# EAGLE board Commlink_Interface_V4_Landscape (EAGLE 6.5.0)
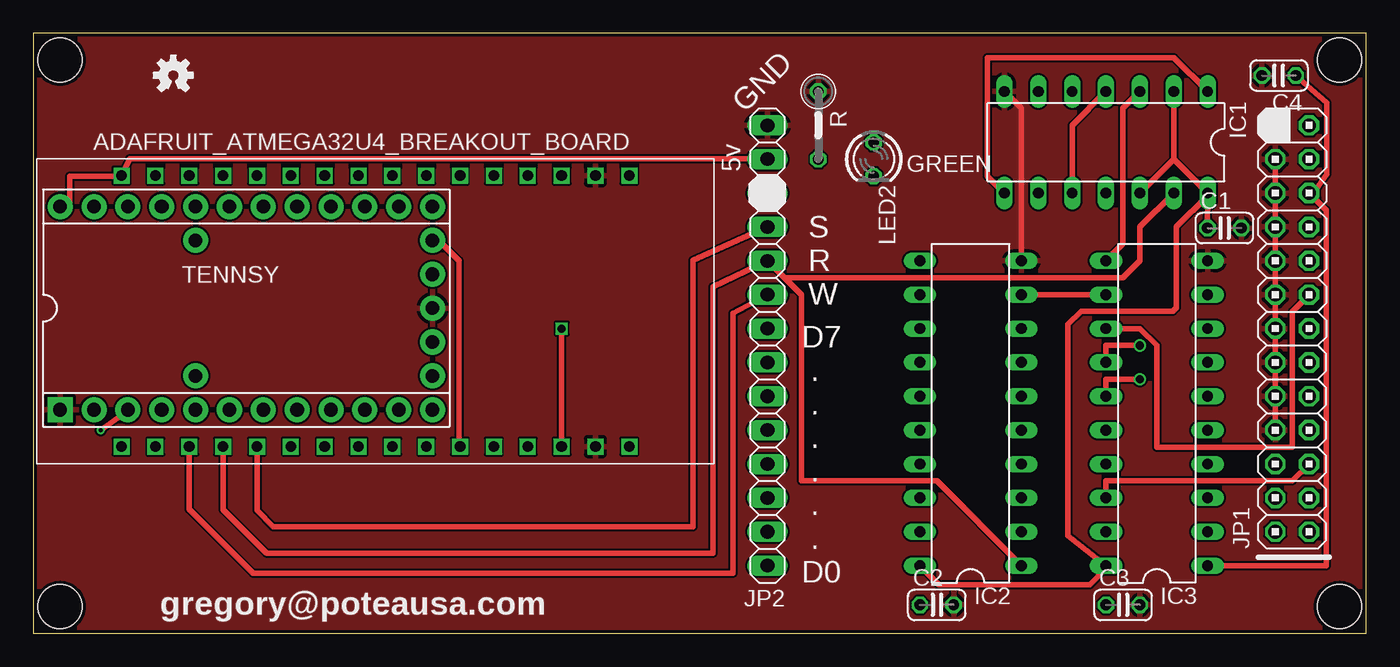
[diagram p0: board, top side]
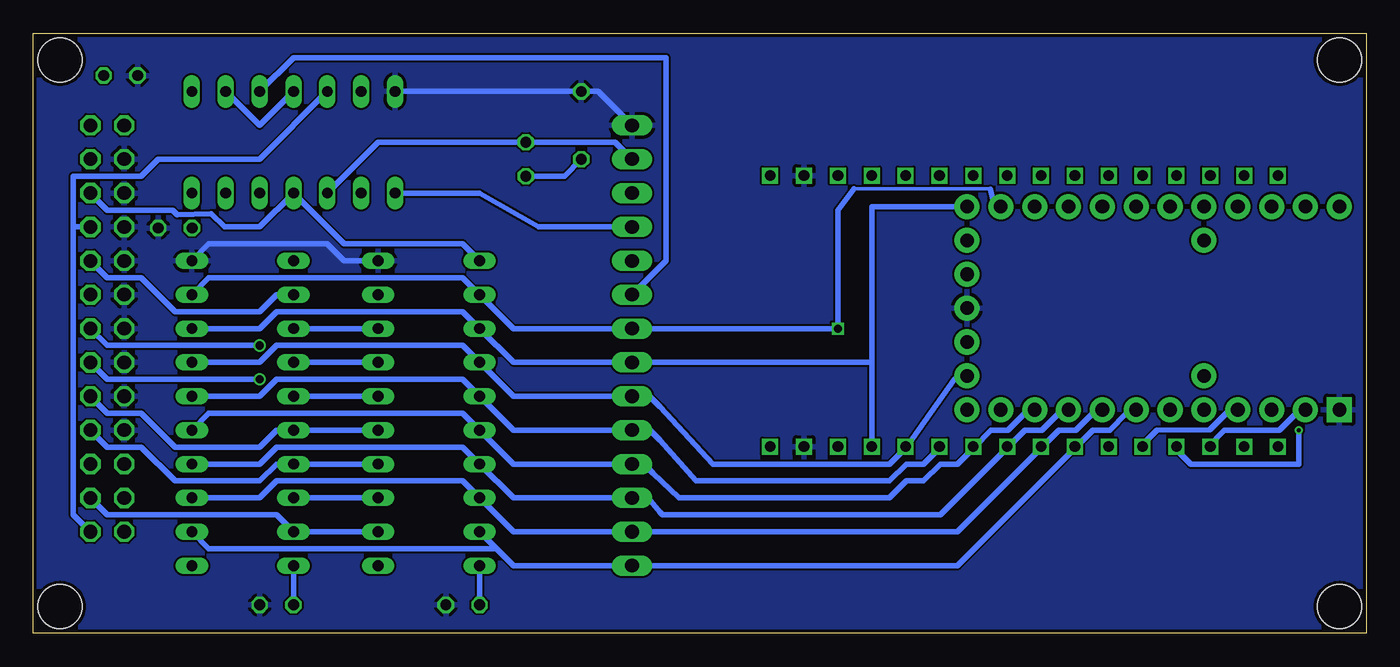
[diagram p1: board, bottom side, seen from below]

Size 100 x 45 mm. Coordinates in mm from the lower left corner, seen from the top.
Outline: 0,0 100,0 100,45 0,45 0,0
Copper layers (1*2*15*16): Top 0.035mm / dielectric 0.2mm / Route2 0.0175mm / dielectric 1.1mm / Route15 0.0175mm / dielectric 0.2mm / Bottom 0.035mm
Design rules "SeeedStudio_DRU_no_angle_20130527": minimum track width 6mil, minimum drill 12mil, track to track 6mil, track to pad 6mil, pad to pad 6mil, via to via 6mil, smd to smd 0mil, copper to edge 10mil, drill to drill 10mil, minimum pad ring 6mil, minimum via ring 6mil, stop-mask expansion 2mil, vias tented up to drill 25mil, thermal gap 10mil

## Footprints (pad centres in the part's own frame; a part is rotated, then mirrored left to right if it is on the bottom)
ATMEGA32U4BREAKOUT = drill 0.8 square: 3V -10.16,19.05; 5V 10.16,19.05; A 10.16,16.51; B0 -10.16,13.97; B1 -10.16,11.43; B2 -10.16,8.89; B3 -10.16,6.35; B4 10.16,-13.97; B5 10.16,-11.43; B6 10.16,-8.89; B7 10.16,-6.35; C6 10.16,-3.81; C7 10.16,-1.27; D0 -10.16,3.81; D1 -10.16,1.27; D2 -10.16,-1.27; D3 -10.16,-3.81; D4 -10.16,-6.35; D5 -10.16,-8.89; D6 -10.16,-11.43; D7 -10.16,-13.97; E6 -10.16,16.51; F0 10.16,13.97; F1 10.16,11.43; F4 10.16,8.89; F5 10.16,6.35; F6 10.16,3.81; F7 10.16,1.27; GND -10.16,-16.51; GND2 10.16,-16.51; RST -10.16,-19.05; VCC 10.16,-19.05
C025-024X044 = drill 0.813 octagon: 1 -1.27,0; 2 1.27,0
STAND-OFF = hole 3.302: 0,0
DIL14 = drill 0.813 long: 1 -7.62,-3.81; 2 -5.08,-3.81; 3 -2.54,-3.81; 4 0,-3.81; 5 2.54,-3.81; 6 5.08,-3.81; 7 7.62,-3.81; 8 7.62,3.81; 9 5.08,3.81; 10 2.54,3.81; 11 0,3.81; 12 -2.54,3.81; 13 -5.08,3.81; 14 -7.62,3.81
DIL20 = drill 0.813 long: 1 -11.43,-3.81; 2 -8.89,-3.81; 3 -6.35,-3.81; 4 -3.81,-3.81; 5 -1.27,-3.81; 6 1.27,-3.81; 7 3.81,-3.81; 8 6.35,-3.81; 9 8.89,-3.81; 10 11.43,-3.81; 11 11.43,3.81; 12 8.89,3.81; 13 6.35,3.81; 14 3.81,3.81; 15 1.27,3.81; 16 -1.27,3.81; 17 -3.81,3.81; 18 -6.35,3.81; 19 -8.89,3.81; 20 -11.43,3.81
2X13 = drill 1.016 octagon: 1 -15.24,-1.27; 2 -15.24,1.27; 3 -12.7,-1.27; 4 -12.7,1.27; 5 -10.16,-1.27; 6 -10.16,1.27; 7 -7.62,-1.27; 8 -7.62,1.27; 9 -5.08,-1.27; 10 -5.08,1.27; 11 -2.54,-1.27; 12 -2.54,1.27; 13 0,-1.27; 14 0,1.27; 15 2.54,-1.27; 16 2.54,1.27; 17 5.08,-1.27; 18 5.08,1.27; 19 7.62,-1.27; 20 7.62,1.27; 21 10.16,-1.27; 22 10.16,1.27; 23 12.7,-1.27; 24 12.7,1.27; 25 15.24,-1.27; 26 15.24,1.27
1X14 = drill 1.016 long: 1 -16.51,0; 2 -13.97,0; 3 -11.43,0; 4 -8.89,0; 5 -6.35,0; 6 -3.81,0; 7 -1.27,0; 8 1.27,0; 9 3.81,0; 10 6.35,0; 11 8.89,0; 12 11.43,0; 13 13.97,0; 14 16.51,0
LED3MM = drill 0.813 octagon: A -1.27,0; K 1.27,0
0207/5V = drill 0.813 octagon: 1 -2.54,0; 2 2.54,0
TEENSY = drill 1.016 pad 1.88: 5V2 13.97,-2.54; +5V -13.97,7.62; B0 -11.43,-7.62; B1 -8.89,-7.62; B2 -6.35,-7.62; B3 -3.81,-7.62; B4 8.89,7.62; B5 6.35,7.62; B6 3.81,7.62; B7 -1.27,-7.62; C6 11.43,-7.62; C7 13.97,-7.62; D0 1.27,-7.62; D1 3.81,-7.62; D2 6.35,-7.62; D3 8.89,-7.62; D4 13.97,5.08; D5 13.97,-5.08; D6 13.97,7.62; D7 11.43,7.62; E6 -3.81,-5.08; F0 -11.43,7.62; F1 -8.89,7.62; F4 -6.35,7.62; F5 -3.81,7.62; F6 -1.27,7.62; F7 1.27,7.62; GRND1 13.97,0; REF -3.81,5.08; RST 13.97,2.54 | drill 1.016 pad 1.88 square: GND -13.97,-7.62

## Placement (x,y rotation side)
ADAFRUIT_ATMEGA32U4_BREAKOUT_BOARD  Adadruit ATMEGA32U4  [ATMEGA32U4BREAKOUT]  25.67,24.17 90 top
C1  0.1uf  [C025-024X044]  89.36,30.4 0 top
C2  0.1uf  [C025-024X044]  67.78,2.13 0 top
C3  0.1uf  [C025-024X044]  81.75,2.13 0 top
C4  180pf  [C025-024X044]  93.45,41.83 180 top
H1  [STAND-OFF]  2,43 0 top
H2  [STAND-OFF]  98,43 0 top
H3  [STAND-OFF]  98,2 0 top
H4  [STAND-OFF]  2,2 0 top
IC1  74LS74N  [DIL14]  80.48,36.83 180 top
IC2  74AS573N  [DIL20]  70.32,16.51 90 top
IC3  74AS573N  [DIL20]  84.29,16.51 90 top
JP1  PAR's DB25  [2X13]  94.45,22.86 90 top
JP2  PC  [1X14]  55.08,21.59 90 top
LED2  GREEN  [LED3MM]  63.06,35.56 270 top
LOGO_OPEN_HARDWARE  [OSHW-LOGO-S]  10.5,41.84 0 top
R  470  [0207/5V]  58.89,38.1 270 top
TENNSY  TEENSY 2.0  [TEENSY]  15.98,24.39 0 top

## Library data of the parts
ADAFRUIT_ATMEGA32U4_BREAKOUT_BOARD = atmega32u4breakout
C1-C4 R = rcl
H1-H4 = SparkFun
IC1-IC3 = 74xx-us
JP1 JP2 = pinhead
LED2 = led
LOGO_OPEN_HARDWARE = SparkFun-Aesthetics
TENNSY = teensy

## Nets
GND: ADAFRUIT_ATMEGA32U4_BREAKOUT_BOARD.GND ADAFRUIT_ATMEGA32U4_BREAKOUT_BOARD.GND2 C1.2 C2.2 C3.2 C4.2 IC1.7 IC2.10 IC3.10 JP1.8 JP1.10 JP1.12 JP1.14 JP1.16 JP1.18 JP1.20 JP1.22 JP1.24 JP2.14 R.1 TENNSY.GND TENNSY.GRND1
N$2: LED2.K R.2
N$10: IC2.3 IC3.18 JP1.5
N$11: IC2.4 IC3.17 JP1.7
N$12: IC2.5 IC3.16 JP1.9
N$13: IC2.6 IC3.15 JP1.11
N$14: IC2.7 IC3.14 JP1.13
N$15: IC2.8 IC3.13 JP1.15
N$17: IC2.2 IC3.19 JP1.3
N$18: IC2.9 IC3.12 JP1.17
PAR_ACK: C4.1 IC1.11 IC2.11 IC3.1 JP1.21
PAR_STB: IC1.5 JP1.1 JP1.19
PC_D0: ADAFRUIT_ATMEGA32U4_BREAKOUT_BOARD.D0 IC2.19 IC3.2 JP2.1 TENNSY.D0
PC_D1: ADAFRUIT_ATMEGA32U4_BREAKOUT_BOARD.D1 IC2.18 IC3.3 JP2.2 TENNSY.D1
PC_D2: ADAFRUIT_ATMEGA32U4_BREAKOUT_BOARD.D2 IC2.17 IC3.4 JP2.3 TENNSY.D2
PC_D3: ADAFRUIT_ATMEGA32U4_BREAKOUT_BOARD.D3 IC2.16 IC3.5 JP2.4 TENNSY.D3
PC_D4: ADAFRUIT_ATMEGA32U4_BREAKOUT_BOARD.D4 IC2.15 IC3.6 JP2.5 TENNSY.D4
PC_D5: ADAFRUIT_ATMEGA32U4_BREAKOUT_BOARD.D5 IC2.14 IC3.7 JP2.6 TENNSY.D5
PC_D6: ADAFRUIT_ATMEGA32U4_BREAKOUT_BOARD.D6 IC2.13 IC3.8 JP2.7 TENNSY.D6
PC_D7: ADAFRUIT_ATMEGA32U4_BREAKOUT_BOARD.D7 IC2.12 IC3.9 JP2.8 TENNSY.D7
PCRD#: ADAFRUIT_ATMEGA32U4_BREAKOUT_BOARD.B1 IC1.13 IC2.1 JP2.10 TENNSY.B1
PCWR: ADAFRUIT_ATMEGA32U4_BREAKOUT_BOARD.B0 IC1.3 IC3.11 JP2.9 TENNSY.B0
STATUS: ADAFRUIT_ATMEGA32U4_BREAKOUT_BOARD.B2 IC1.1 IC1.8 JP2.11 TENNSY.B2
VCC: ADAFRUIT_ATMEGA32U4_BREAKOUT_BOARD.5V C1.1 C2.1 C3.1 IC1.2 IC1.4 IC1.10 IC1.12 IC1.14 IC2.20 IC3.20 JP2.13 LED2.A TENNSY.+5V

## Tracks (layer width: path | path; a pad name or v marks a point on that pad's centre or on a via)
GND
  Top 0.406: JP1.8 JP1.10 JP1.12 JP1.14 JP1.16 JP1.18 JP1.20 JP1.22 JP1.24 | IC2.10 74.13,39.37 IC1.7
  Bottom 0.406: JP2.14 57.62,40.64 R.1 IC1.7 | IC3.10 86.83,29.21 77.94,29.21 76.67,27.94 IC2.10
  pour Top: 0,45 100,45 100,0 0,0
  pour Bottom: 0,45 100,45 100,0 0,0
N$2
  Bottom 0.406: R.2 60.16,34.29 LED2.K
N$10
  Top 0.406: JP1.5 94.45,11.43 80.48,11.43 IC3.18
  Bottom 0.406: IC3.18 IC2.3
N$11
  Bottom 0.406: IC2.4 IC3.17 81.75,12.7 83.02,11.43 89.37,11.43 91.91,13.97 94.45,13.97 JP1.7
N$12
  Bottom 0.406: IC2.5 IC3.16 81.75,15.24 83.02,13.97 89.37,13.97 91.91,16.51 94.45,16.51 JP1.9
N$13  (via drill 0.61)
  Top 0.406: v83.02,19.05 80.48,19.05 IC3.15
  Bottom 0.406: IC3.15 IC2.6 | JP1.11 94.45,19.05 v83.02,19.05
N$14  (via drill 0.61)
  Top 0.406: v83.02,21.59 80.48,21.59 IC3.14
  Bottom 0.406: IC3.14 IC2.7 | JP1.13 94.45,21.59 v83.02,21.59
N$15
  Top 0.406: JP1.15 94.45,24.13 94.45,13.97 84.29,13.97 84.29,21.59 83.02,22.86 IC3.13
  Bottom 0.406: IC3.13 IC2.8
N$17
  Bottom 0.406: IC2.2 IC3.19 81.75,8.89 94.45,8.89 JP1.3
N$18
  Top 0.406: IC3.12 IC2.9
  Bottom 0.406: JP1.17 94.45,26.67 91.91,26.67 89.37,24.13 83.02,24.13 81.75,25.4 IC3.12
PAR_ACK
  Top 0.406: IC3.1 96.99,5.08 96.99,31.75 JP1.21 96.03,33.02 97.04,34.44 97.04,39.78 C4.1
  Bottom 0.406: IC2.11 67.78,29.21 76.67,29.21 IC1.11 83.02,30.48 85.64,30.48 86.66,31.46 89.19,31.41 89.56,31.73 94.45,31.75 JP1.21
PAR_STB
  Bottom 0.406: IC1.5 83.02,35.56 90.64,35.56 91.91,34.29 96.99,34.29 96.99,30.48 | JP1.19 96.99,30.48 | JP1.1 96.99,8.89 96.99,30.48
PC_D0
  Bottom 0.406: 65.24,6.35 63.97,5.08 JP2.1 30.68,5.08 21.79,13.97 | 65.24,6.35 IC2.19 | IC3.2 86.83,6.35 65.24,6.35 | 21.79,13.97 20.52,15.24 19.25,15.24 17.98,16.51 TENNSY.D0 | 21.79,13.97 ADAFRUIT_ATMEGA32U4_BREAKOUT_BOARD.D0
PC_D1
  Bottom 0.406: IC3.3 83.02,10.16 81.75,11.43 67.78,11.43 IC2.18 63.97,7.62 JP2.2 30.68,7.62 24.33,13.97 | 24.33,13.97 23.06,15.24 21.79,15.24 20.52,16.51 TENNSY.D1 | 24.33,13.97 ADAFRUIT_ATMEGA32U4_BREAKOUT_BOARD.D1
PC_D2
  Bottom 0.406: IC3.4 83.02,12.7 81.75,13.97 67.78,13.97 IC2.17 63.97,10.16 JP2.3 53.88,10.16 53,9.08 52.81,8.89 31.95,8.89 26.87,13.97 | 26.87,13.97 25.6,15.24 24.33,15.24 23.06,16.51 TENNSY.D2 | 26.87,13.97 ADAFRUIT_ATMEGA32U4_BREAKOUT_BOARD.D2
PC_D3
  Bottom 0.406: IC3.5 86.83,16.51 67.78,16.51 IC2.16 63.97,12.7 JP2.4 54.2,12.7 53.5,12 51.54,10.16 35.76,10.16 34.49,11.43 33.22,11.43 31.95,12.7 30.68,12.7 29.41,13.97 | 29.41,13.97 28.14,15.24 26.87,15.24 25.6,16.51 TENNSY.D3 | 29.41,13.97 ADAFRUIT_ATMEGA32U4_BREAKOUT_BOARD.D3
PC_D4
  Top 0.406: 30,29.5 30,29.47 TENNSY.D4 30.68,29.21 31.95,27.94 31.95,13.97 ADAFRUIT_ATMEGA32U4_BREAKOUT_BOARD.D4
  Bottom 0.406: IC3.6 83.02,17.78 81.75,19.05 67.78,19.05 IC2.15 63.97,15.24 JP2.5 53.74,15.24 53,14.5 50.27,11.43 35.76,11.43 34.49,12.7 33.22,12.7 31.95,13.97 ADAFRUIT_ATMEGA32U4_BREAKOUT_BOARD.D4
PC_D5
  Bottom 0.406: IC3.7 83.02,20.32 81.75,21.59 67.78,21.59 IC2.14 63.97,17.78 JP2.6 53.78,17.78 53,17 49,12.7 35.76,12.7 34.49,13.97 | 34.49,13.97 30.91,19.05 TENNSY.D5 | 34.49,13.97 ADAFRUIT_ATMEGA32U4_BREAKOUT_BOARD.D5
PC_D6
  Bottom 0.406: IC3.8 83.02,22.86 81.75,24.13 67.78,24.13 IC2.13 63.97,20.32 JP2.7 37.1,20.32 | TENNSY.D6 37.1,32.01 37.1,20.32 | 37.1,20.32 ADAFRUIT_ATMEGA32U4_BREAKOUT_BOARD.D6
PC_D7  (via drill 0.6)
  Top 0.406: v39.64,22.86 ADAFRUIT_ATMEGA32U4_BREAKOUT_BOARD.D7
  Bottom 0.305: 28.21,33.31 38.43,33.33
  Bottom 0.406: IC3.9 86.83,26.67 67.78,26.67 IC2.12 63.97,22.86 JP2.8 v39.64,22.86 39.64,31.69 39.62,31.71 38.43,33.33 | TENNSY.D7 27.99,32.51 28.21,33.31
PCRD#  (via drill 0.3)
  Top 0.406: IC2.1 67.78,11.43 57.62,11.43 57.62,25.4 56.35,26.67 | 56.35,26.67 JP2.10 51,26 51,6 17.5,6 14.24,9.26 ADAFRUIT_ATMEGA32U4_BREAKOUT_BOARD.B1 | IC1.13 83.02,30.48 83.02,27.94 81.75,26.67 56.35,26.67 | v5.05,15.24 6.82,16.51 TENNSY.B1
  Bottom 0.152: 14.44,13.97 ADAFRUIT_ATMEGA32U4_BREAKOUT_BOARD.B1
  Bottom 0.406: v5.05,15.24 5.05,12.7 13.17,12.7 14.44,13.97
PCWR
  Top 0.406: IC3.11 81.75,29.21 81.75,39.37 IC1.3 | ADAFRUIT_ATMEGA32U4_BREAKOUT_BOARD.B0 11.7,9.3 16.5,4.5 52.5,4.5 52.5,24 JP2.9
  Bottom 0.152: 11.9,13.97 ADAFRUIT_ATMEGA32U4_BREAKOUT_BOARD.B0
  Bottom 0.406: JP2.9 52.54,27.94 52.54,43.18 80.48,43.18 IC1.3 | 11.9,13.97 10.63,15.24 6.53,15.24 5.26,16.51 4.28,16.51 TENNSY.B0
STATUS
  Top 0.406: IC1.1 85.56,43.18 71.59,43.18 71.59,34.29 IC1.8 | ADAFRUIT_ATMEGA32U4_BREAKOUT_BOARD.B2 16.78,9.22 18,8 49.5,8 49.5,28 JP2.11
  Bottom 0.152: 16.98,13.97 ADAFRUIT_ATMEGA32U4_BREAKOUT_BOARD.B2
  Bottom 0.406: IC1.8 66.51,33.02 62.09,30.48 JP2.11 | 16.98,13.97 15.71,15.24 11.73,15.27 10.46,16.54 9.36,16.51 TENNSY.B2
VCC
  Top 0.406: 85.56,35.56 IC1.12 | IC1.2 85.56,35.56 | IC1.4 77.94,38.1 IC1.10 | C1.1 IC1.14 | 85.56,35.56 IC1.14 | IC1.14 88.1,32.82 85.76,30.48 85.76,24.43 85.48,24.16 78.63,24.16 77.64,23.16 77.64,7.32 IC3.20 80.48,4.88 79.26,3.66 67.93,3.66 IC2.20 | TENNSY.+5V 2.74,31.75 2.74,34.29 6.55,34.29 ADAFRUIT_ATMEGA32U4_BREAKOUT_BOARD.5V 7.24,35.61 53.61,35.59 JP2.13
  Bottom 0.406: IC1.2 83.02,38.1 IC1.4 | IC1.10 74.13,36.83 LED2.A 56.35,36.83 JP2.13 | IC2.20 C2.1 | IC3.20 C3.1

## Text on the board
tPlace: GND | 5v | S / R / W | D7 / . / . / . / . / . / . / D0 | gregory@poteausa.com
tValues: Comm Link USB